# EAGLE board Rear serial board (EAGLE 7.5.0)
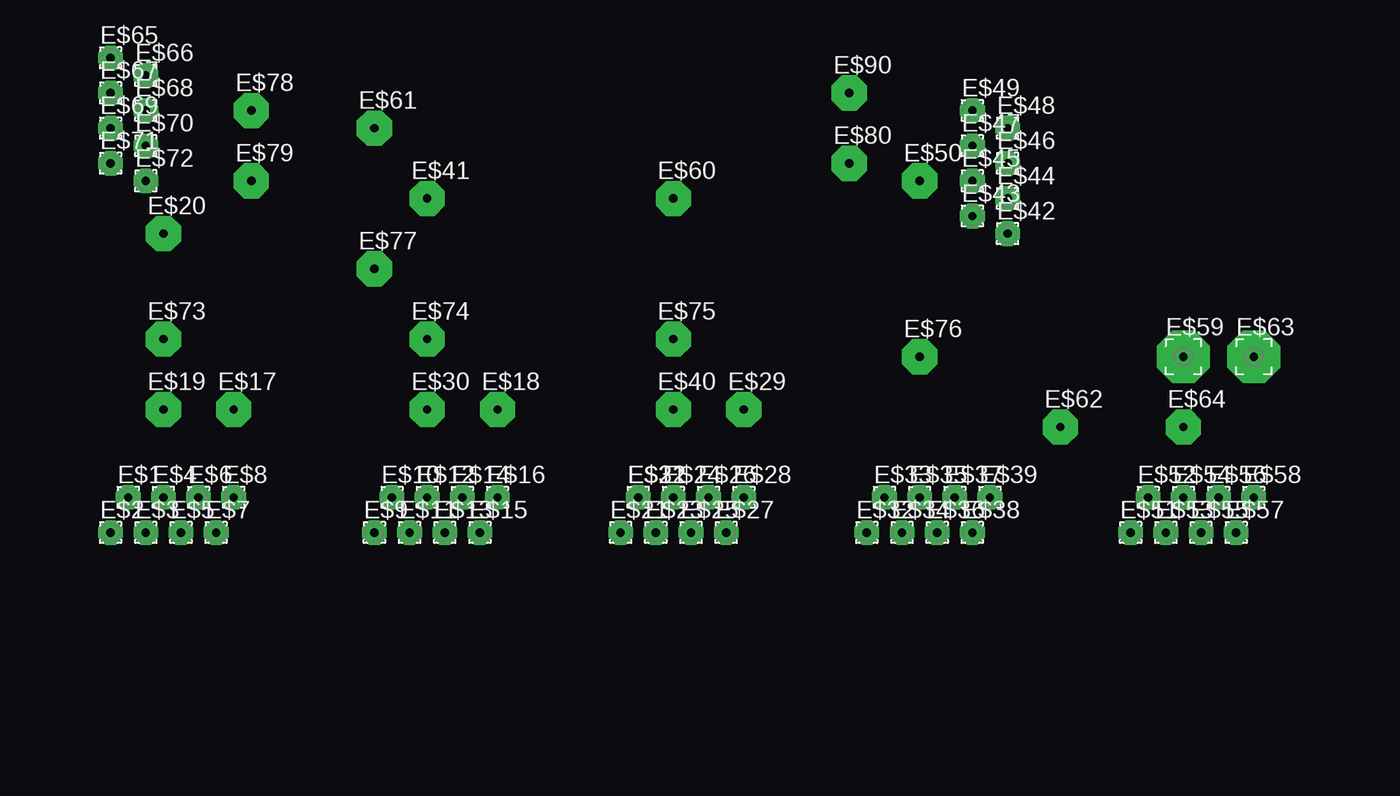
[diagram p0: board, top side]
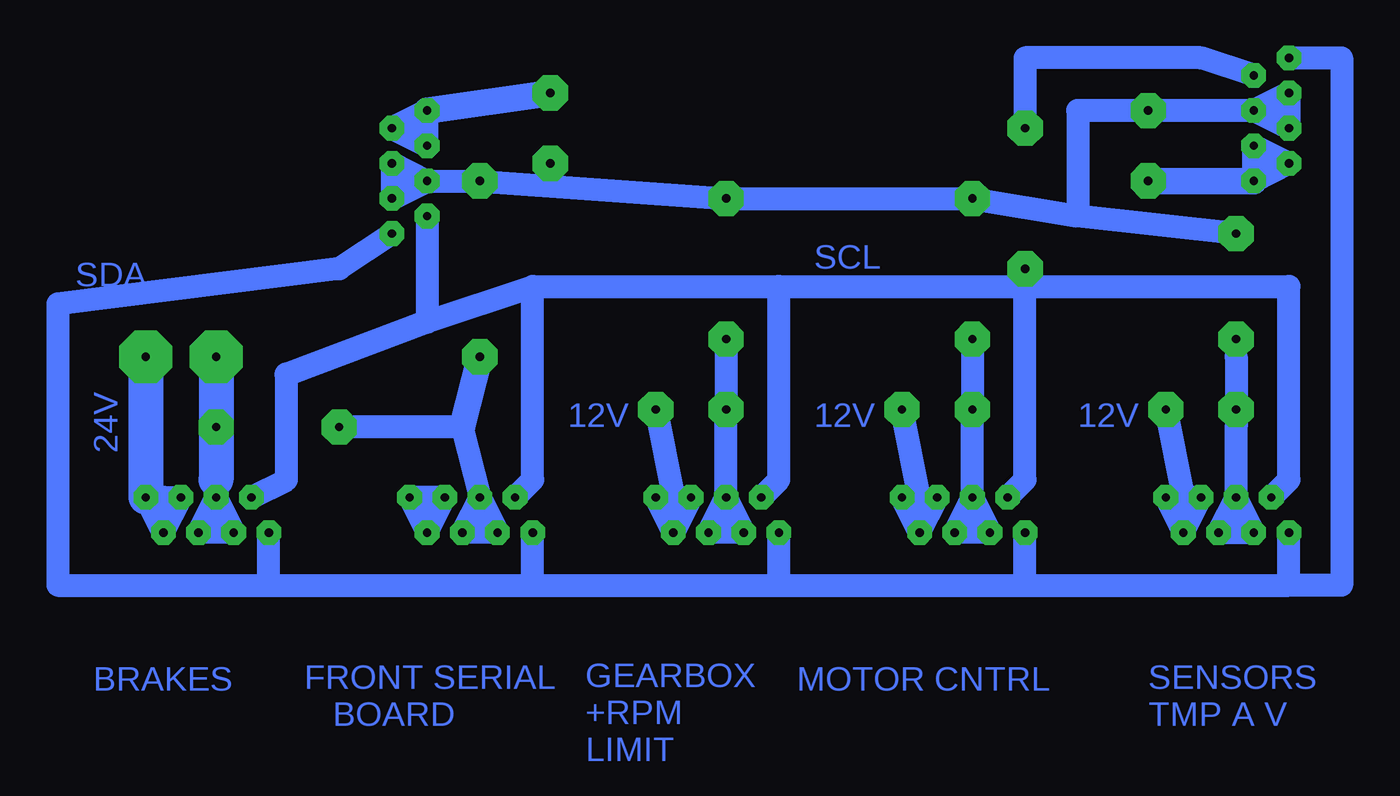
[diagram p1: board, bottom side, seen from below]

No outline drawn. Coordinates in mm, seen from the top.
Copper layers (1*16): Top 0.035mm / dielectric 1.5mm / Bottom 0.035mm
Design rules "default": minimum track width 10mil, minimum drill 24mil, track to track 8mil, track to pad 8mil, pad to pad 8mil, via to via 8mil, smd to smd 8mil, copper to edge 40mil, drill to drill 8mil, minimum pad ring 10mil, minimum via ring 8mil, stop-mask expansion 4mil, vias tented up to drill 0mil, thermal gap 10mil

## Footprints (pad centres in the part's own frame; a part is rotated, then mirrored left to right if it is on the bottom)
1,6/0,8 = drill 0.6 pad 1.778 octagon: 1 0,0
2,15/1,0 = drill 0.6 pad 2.54 octagon: 1 0,0
2,54/0,8 = drill 0.6 pad 3.81 octagon: 1 0,0

## Placement (x,y rotation side)
E$1  [1,6/0,8]  5.08,3.81 0 top
E$2  [1,6/0,8]  3.81,1.27 0 top
E$3  [1,6/0,8]  6.35,1.27 0 top
E$4  [1,6/0,8]  7.62,3.81 0 top
E$5  [1,6/0,8]  8.89,1.27 0 top
E$6  [1,6/0,8]  10.16,3.81 0 top
E$7  [1,6/0,8]  11.43,1.27 0 top
E$8  [1,6/0,8]  12.7,3.81 0 top
E$9  [1,6/0,8]  22.86,1.27 0 top
E$10  [1,6/0,8]  24.13,3.81 0 top
E$11  [1,6/0,8]  25.4,1.27 0 top
E$12  [1,6/0,8]  26.67,3.81 0 top
E$13  [1,6/0,8]  27.94,1.27 0 top
E$14  [1,6/0,8]  29.21,3.81 0 top
E$15  [1,6/0,8]  30.48,1.27 0 top
E$16  [1,6/0,8]  31.75,3.81 0 top
E$17  [2,15/1,0]  12.7,10.16 0 top
E$18  [2,15/1,0]  31.75,10.16 0 top
E$19  [2,15/1,0]  7.62,10.16 0 top
E$20  [2,15/1,0]  7.62,22.86 0 top
E$21  [1,6/0,8]  40.64,1.27 0 top
E$22  [1,6/0,8]  41.91,3.81 0 top
E$23  [1,6/0,8]  43.18,1.27 0 top
E$24  [1,6/0,8]  44.45,3.81 0 top
E$25  [1,6/0,8]  45.72,1.27 0 top
E$26  [1,6/0,8]  46.99,3.81 0 top
E$27  [1,6/0,8]  48.26,1.27 0 top
E$28  [1,6/0,8]  49.53,3.81 0 top
E$29  [2,15/1,0]  49.53,10.16 0 top
E$30  [2,15/1,0]  26.67,10.16 0 top
E$31  [1,6/0,8]  41.91,3.81 0 top
E$32  [1,6/0,8]  58.42,1.27 0 top
E$33  [1,6/0,8]  59.69,3.81 0 top
E$34  [1,6/0,8]  60.96,1.27 0 top
E$35  [1,6/0,8]  62.23,3.81 0 top
E$36  [1,6/0,8]  63.5,1.27 0 top
E$37  [1,6/0,8]  64.77,3.81 0 top
E$38  [1,6/0,8]  66.04,1.27 0 top
E$39  [1,6/0,8]  67.31,3.81 0 top
E$40  [2,15/1,0]  44.45,10.16 0 top
E$41  [2,15/1,0]  26.67,25.4 0 top
E$42  [1,6/0,8]  68.58,22.86 0 top
E$43  [1,6/0,8]  66.04,24.13 0 top
E$44  [1,6/0,8]  68.58,25.4 0 top
E$45  [1,6/0,8]  66.04,26.67 0 top
E$46  [1,6/0,8]  68.58,27.94 0 top
E$47  [1,6/0,8]  66.04,29.21 0 top
E$48  [1,6/0,8]  68.58,30.48 0 top
E$49  [1,6/0,8]  66.04,31.75 0 top
E$50  [2,15/1,0]  62.23,26.67 0 top
E$51  [1,6/0,8]  77.47,1.27 0 top
E$52  [1,6/0,8]  78.74,3.81 0 top
E$53  [1,6/0,8]  80.01,1.27 0 top
E$54  [1,6/0,8]  81.28,3.81 0 top
E$55  [1,6/0,8]  82.55,1.27 0 top
E$56  [1,6/0,8]  83.82,3.81 0 top
E$57  [1,6/0,8]  85.09,1.27 0 top
E$58  [1,6/0,8]  86.36,3.81 0 top
E$59  [2,54/0,8]  81.28,13.97 0 top
E$60  [2,15/1,0]  44.45,25.4 0 top
E$61  [2,15/1,0]  22.86,30.48 0 top
E$62  [2,15/1,0]  72.39,8.89 0 top
E$63  [2,54/0,8]  86.36,13.97 0 top
E$64  [2,15/1,0]  81.28,8.89 0 top
E$65  [1,6/0,8]  3.81,35.56 0 top
E$66  [1,6/0,8]  6.35,34.29 0 top
E$67  [1,6/0,8]  3.81,33.02 0 top
E$68  [1,6/0,8]  6.35,31.75 0 top
E$69  [1,6/0,8]  3.81,30.48 0 top
E$70  [1,6/0,8]  6.35,29.21 0 top
E$71  [1,6/0,8]  3.81,27.94 0 top
E$72  [1,6/0,8]  6.35,26.67 0 top
E$73  [2,15/1,0]  7.62,15.24 0 top
E$74  [2,15/1,0]  26.67,15.24 0 top
E$75  [2,15/1,0]  44.45,15.24 0 top
E$76  [2,15/1,0]  62.23,13.97 0 top
E$77  [2,15/1,0]  22.86,20.32 0 top
E$78  [2,15/1,0]  13.97,31.75 0 top
E$79  [2,15/1,0]  13.97,26.67 0 top
E$80  [2,15/1,0]  57.15,27.94 0 top
E$90  [2,15/1,0]  57.15,33.02 0 top

## Library data of the parts
E$1-E$80 E$90 = cls

## Nets
S$1: E$59.1
S$2: E$6.1 E$7.1 E$8.1 E$17.1
S$3: E$14.1 E$15.1 E$16.1 E$18.1
S$4: E$11.1 E$12.1 E$13.1 E$30.1 E$74.1
S$5: E$23.1 E$24.1 E$25.1 E$40.1 E$75.1
S$6: E$70.1 E$71.1 E$72.1
S$7: E$37.1 E$38.1 E$39.1
S$8: E$56.1 E$57.1 E$58.1 E$63.1
S$9: E$53.1 E$54.1 E$55.1
S$10: E$47.1 E$48.1 E$49.1 E$90.1
S$11: E$20.1 E$41.1 E$44.1 E$45.1 E$46.1 E$50.1 E$60.1 E$67.1 E$68.1 E$69.1
S$12: E$26.1 E$27.1 E$28.1 E$29.1
S$13: E$1.1 E$10.1 E$22.1 E$33.1 E$43.1 E$52.1
S$15: E$3.1 E$4.1 E$5.1 E$19.1
S$16: E$34.1 E$35.1 E$36.1 E$62.1 E$76.1
S$18: E$61.1 E$66.1
S$21: E$2.1 E$9.1 E$21.1 E$32.1 E$42.1 E$51.1 E$65.1

## Tracks (layer width: path | path; a pad name or v marks a point on that pad's centre or on a via)
S$1
  Bottom 2.54: E$59.1 81.28,5.08
S$2
  Bottom 1.676: 11.43,3.81 E$6.1 E$7.1 E$8.1 11.43,3.81 | E$17.1 11.43,3.81
S$3
  Bottom 1.676: E$14.1 E$15.1 E$16.1 30.48,3.81 E$18.1
S$4
  Bottom 1.676: E$12.1 E$11.1 E$13.1 E$12.1 | E$12.1 E$30.1 E$74.1
S$5
  Bottom 1.676: E$24.1 E$23.1 E$25.1 E$24.1 | E$24.1 E$40.1 E$75.1
S$6
  Bottom 1.676: E$71.1 E$72.1 E$70.1 E$71.1
  Bottom 1.93: 13.97,26.67 E$72.1
S$7
  Bottom 1.676: E$37.1 E$39.1 E$38.1 E$37.1
S$8
  Bottom 1.676: 85.09,3.81 E$56.1 E$57.1 E$58.1
  Bottom 2.54: E$63.1 E$58.1
S$9
  Bottom 1.676: E$54.1 E$53.1 E$55.1 E$54.1
S$10
  Bottom 1.676: E$49.1 E$48.1 E$47.1 E$49.1
  Bottom 1.93: E$49.1 E$90.1
S$11
  Bottom 1.676: E$45.1 E$46.1 E$44.1 E$45.1 | E$45.1 E$50.1 E$60.1 E$41.1 19.05,24.13 | E$68.1 E$69.1 E$67.1 E$68.1 | E$68.1 19.05,31.75 19.05,24.13 | E$20.1 19.05,24.13
S$12
  Bottom 1.676: E$29.1 48.26,3.81 E$26.1 E$27.1 E$28.1
S$13
  Bottom 1.676: E$33.1 58.42,5.08 58.42,19.05 | E$22.1 40.64,5.08 40.64,19.05 | E$10.1 22.86,5.08 22.86,19.05 | E$1.1 3.81,5.08 3.81,19.05 22.86,19.05 | E$43.1 66.04,16.51 58.42,19.05 | 58.42,19.05 40.64,19.05 | 40.64,19.05 22.86,19.05 | E$52.1 76.2,5.08 76.2,12.7
  Bottom 1.778: 66.04,16.51 76.2,12.7
S$15
  Bottom 1.676: 7.62,13.97 E$19.1 7.62,8.89 E$4.1 | E$4.1 E$5.1 E$3.1 E$4.1
S$16
  Bottom 1.676: E$62.1 63.5,8.89 E$35.1 | E$35.1 E$34.1 E$36.1 E$35.1
  Bottom 1.93: 63.5,8.89 E$76.1
S$18
  Bottom 1.676: E$66.1 10.16,35.56 22.86,35.56 E$61.1
S$21
  Bottom 1.676: E$65.1 0,35.56 0,-2.54 3.81,-2.54 | E$42.1 72.39,20.32 92.71,17.78 92.71,-2.54 77.47,-2.54 | 77.47,-2.54 E$51.1 | 77.47,-2.54 58.42,-2.54 | 58.42,-2.54 E$32.1 | 58.42,-2.54 40.64,-2.54 | 40.64,-2.54 E$21.1 | 40.64,-2.54 22.86,-2.54 | 22.86,-2.54 E$9.1 | 22.86,-2.54 3.81,-2.54 | 3.81,-2.54 E$2.1

## Text on the board
Bottom: SCL | SDA | 24V | 12V | 12V | 12V | MOTOR CNTRL | BRAKES | SENSORS / TMP A V | FRONT SERIAL / BOARD | GEARBOX / +RPM / LIMIT